# Altium PCB UZ_D_Incr_Encoder.PcbDoc (part 1 of 2)
Units mm, origin at the board's own origin, x right, y up, seen from the top; angles counter-clockwise.
Board outline 155.99 x 100 mm, 2 copper layers (Top Layer, Bottom Layer), stack 0.45 mm thick; 103 components, 109 nets, 501 pads, 172 vias.
Unrouted connection lines stored in the file: 15.
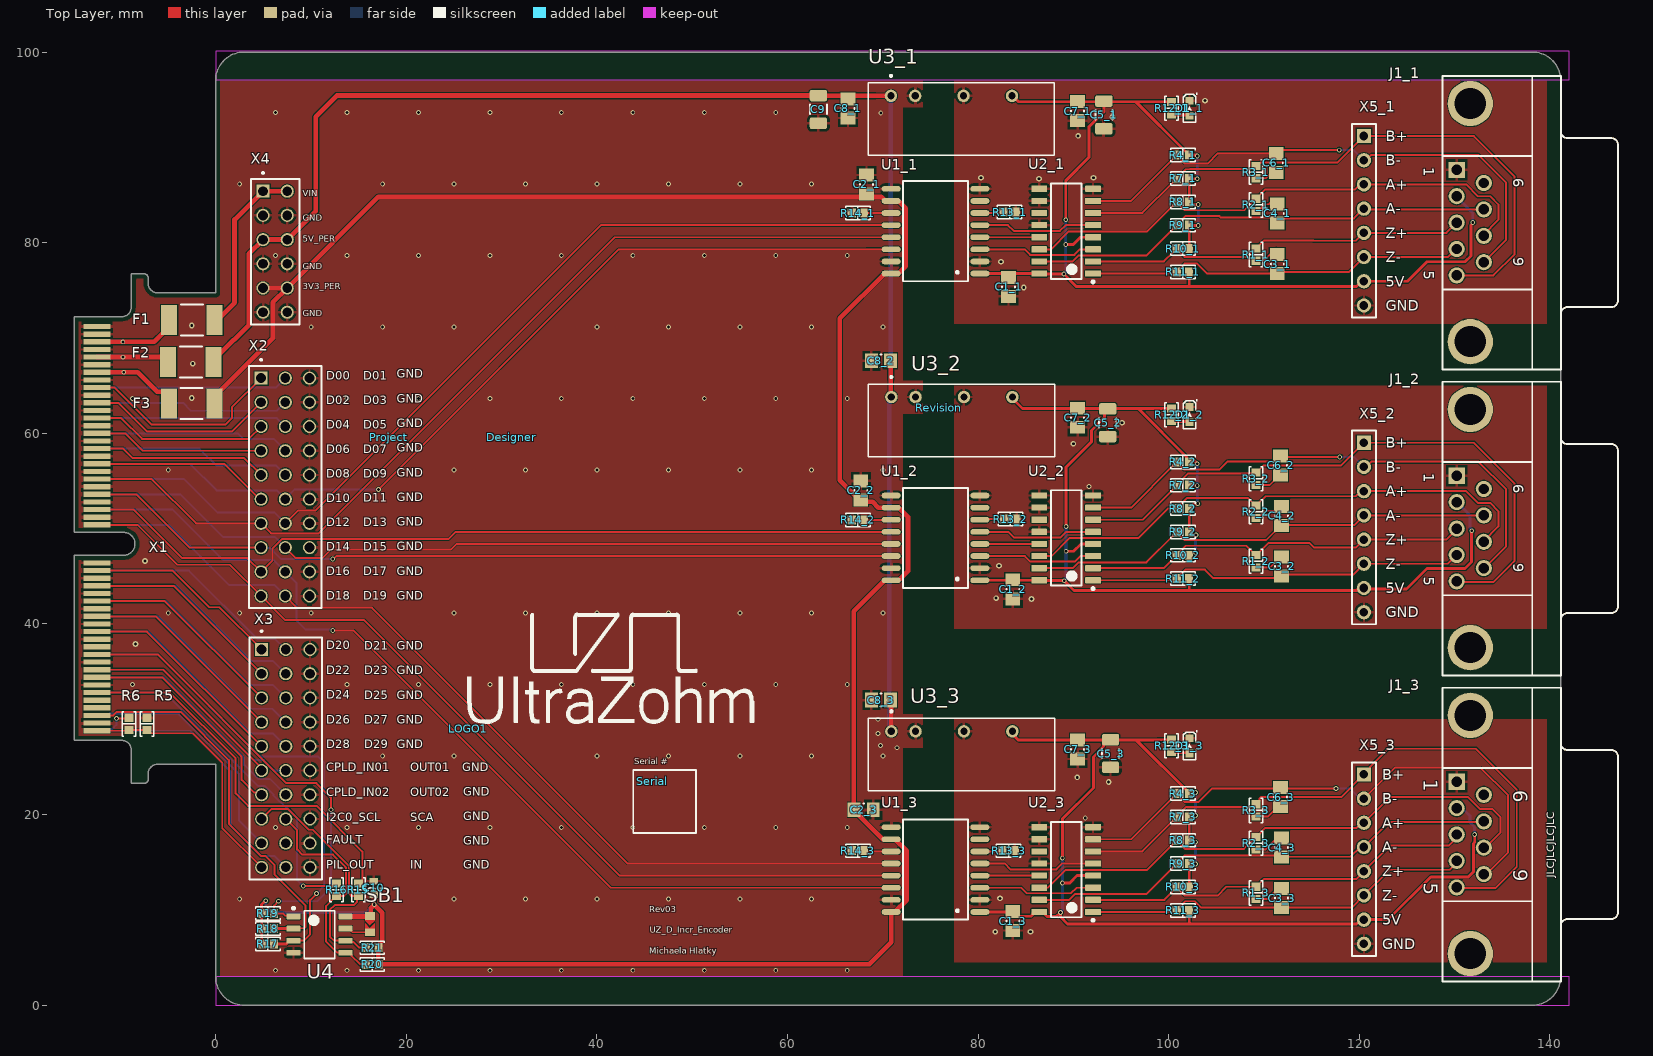
[diagram p0: Top Layer view]
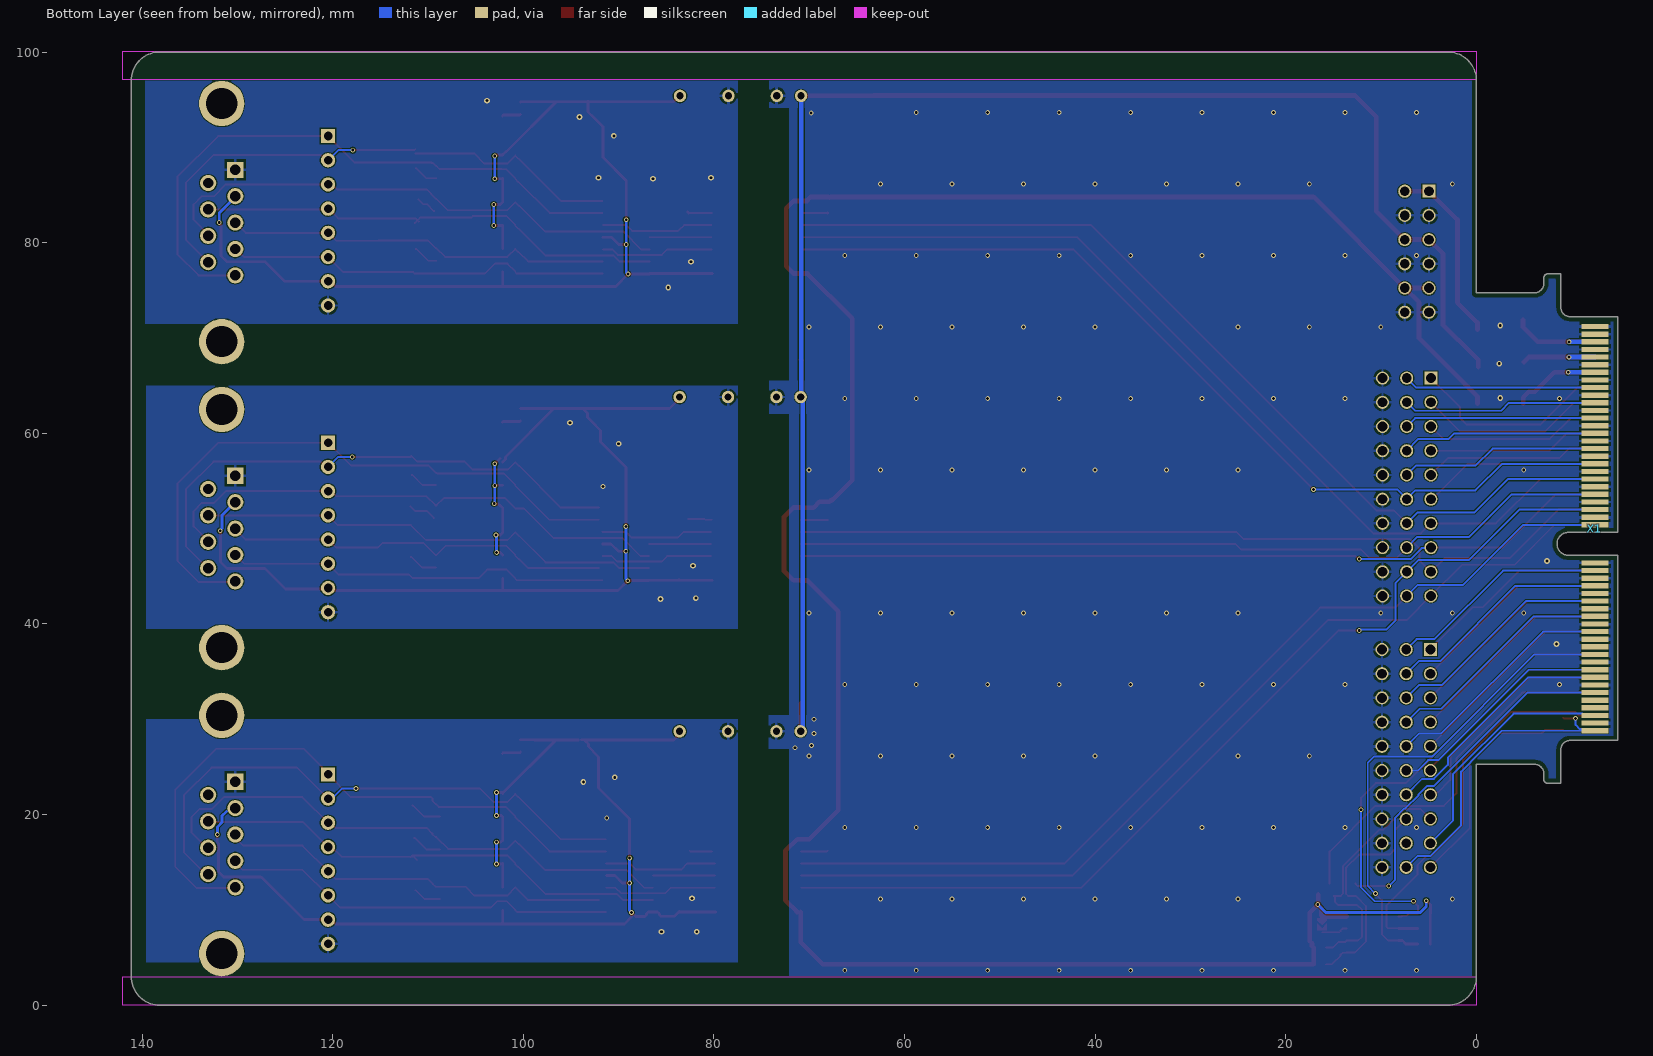
[diagram p1: Bottom Layer view, seen from below]
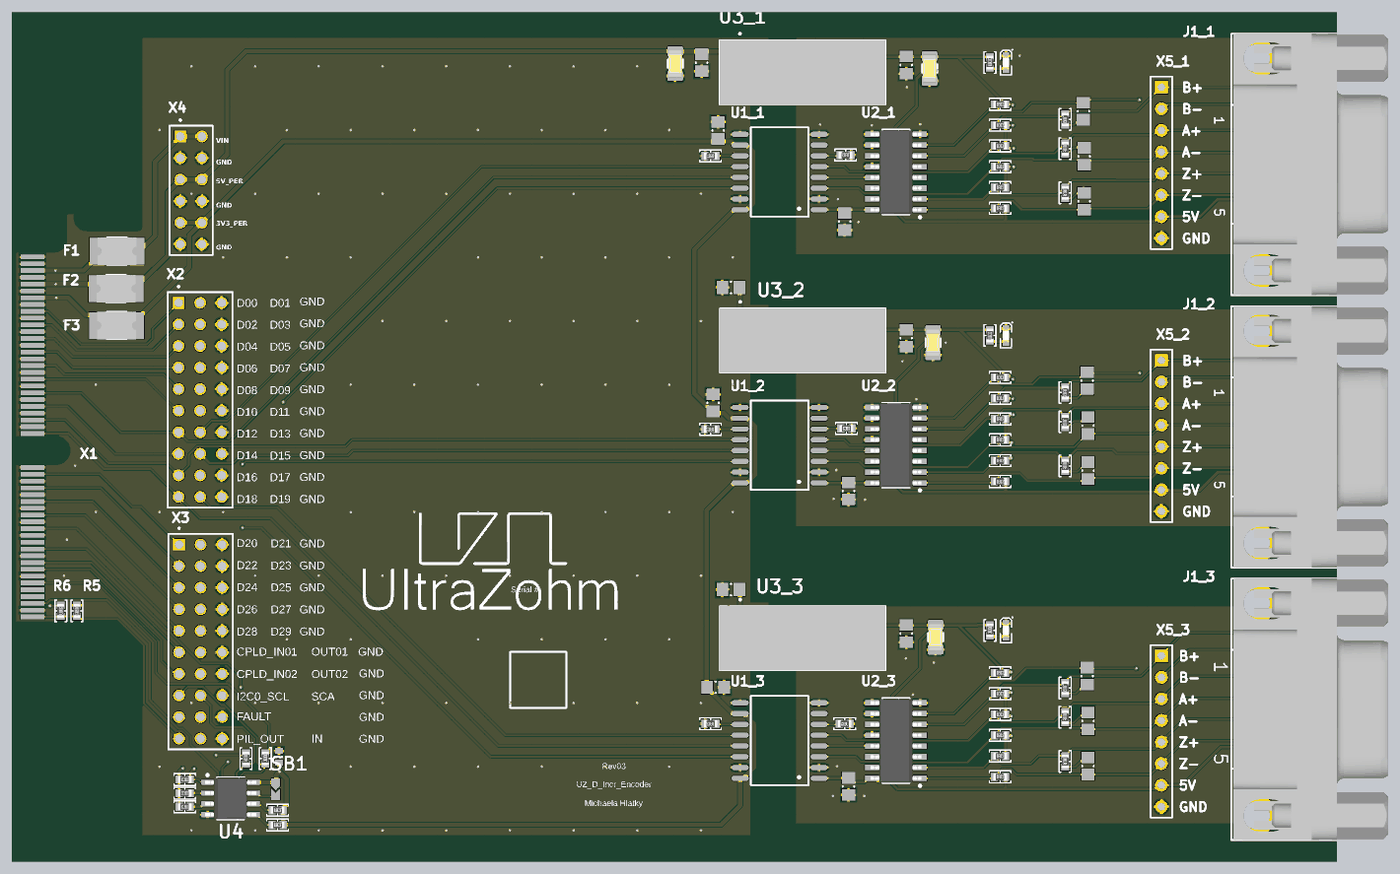
[diagram p3: 3D render of the assembled board from above, using the file's embedded part models]

## Layer stack, top to bottom
Top Solder: solder mask 0.01, Solder Resist, Dk 3.5
Top Layer: signal copper 0.035
Dielectric 1: core 0.38, Core-036, Dk 4.4
Bottom Layer: signal copper 0.035
Bottom Solder: solder mask 0.01, Solder Resist, Dk 3.5

## Board outline
-8.853,26.775 ccw(c-9.853,26.775) -9.853,27.775 -14.853,27.775 -14.853,47.2 -9.653,47.2 ccw(c-9.653,48.4) -9.653,49.6 -14.853,49.6 -14.853,72.225 -9.853,72.225 ccw(c-9.853,73.225) -8.853,73.225 -8.853,76.725 -7.473,76.725 cw(c-7.473,76.325) -7.073,76.325 -7.073,75.725 ccw(c-6.073,75.725) -6.073,74.725 0,74.725 0,97 cw(c3,97) 3,100 138.141,100 cw(c138.141,97) 141.141,97 141.141,3 cw(c138.141,3) 138.141,0 3,0 cw(c3,3) 0,3 0,25.275 -6.073,25.275 ccw(c-6.073,24.275) -7.073,24.275 -7.073,23.675 cw(c-7.473,23.675) -7.473,23.275 -8.853,23.275

## Design rules (kind name [scope] priority, off if disabled: settings)
AssemblyTestPointUsage [InNetClass('3V3_SingleEnded') or InNetClass('5V_SingleEnded') or InNetClass('15V_SingleEnded') or InNetClass('DifferentialSignals')] p1:
BoardOutlineClearance [All] p1: gap=0.5 ignorepadtopadclearanceinfootprint=FALSE except(0: Text-OutlineEdge Text-CavityEdge Text-CutoutEdge Text-SplitBarrior Text-SplitContinuation)
Clearance Clearance_Differential [InNetClass('DifferentialSignals')] p1: gap=0.1 ignorepadtopadclearanceinfootprint=TRUE except(0: Arc-Hole Track-Hole SMDPad-Hole THPad-Hole Via-Hole Fill-Hole Poly-Hole Region-Hole Text-Hole; 0.3: SMDPad-Via; 0.4: THPad-Via)
Clearance Clearance_Power [InNetClass('Power')] p2: gap=0.1 ignorepadtopadclearanceinfootprint=TRUE except(0: Arc-Hole Track-Hole SMDPad-Hole THPad-Hole Via-Hole Fill-Hole Poly-Hole Region-Hole Text-Hole; 0.15: Via-Poly; 0.2: Track-Poly; 0.25: THPad-Poly; 0.3: Fill-Poly Poly-Region; 0.5: Poly-Poly)
Clearance [All] p3: gap=0.1 ignorepadtopadclearanceinfootprint=TRUE except(0: Arc-Hole Track-Hole SMDPad-Hole THPad-Hole Via-Hole Fill-Hole Poly-Hole Region-Hole Text-Hole; 0.4: SMDPad-Via THPad-Via; 0.5: Poly-Poly)
ComponentClearance [All] p1: gap=0.1 collisioncheckmode=3 verticalgap=0.1 showdistances=FALSE
DiffPairsRouting [InNetClass('DifferentialSignals')] p1: maxlimit=0.127 minlimit=0.127 mostfreqgap=0.127 toplayer_minwidth=0.1 toplayer_maxwidth=0.285 toplayer_prefwidth=0.232 bottomlayer_minwidth=0.1 bottomlayer_maxwidth=0.285 bottomlayer_prefwidth=0.232 impedanceprofiledriven=TRUE impedanceprofileid={5F7DE71B-7B0B-4CDE-8AE7-8AD61221F3A5} impedanceprofilevalue=100.000000 maxuncoupledlength=12.7
FanoutControl Fanout_Power [InNetClass('Power') or InNet('ENABLE')] p1: bgadir=Out bgaviamode=Centered fanoutstyle=Auto fanoutdirection=None viagrid=0.025
FanoutControl Fanout_RS422 [InNetClass('DifferentialSignals')] p2: bgadir=Out bgaviamode=Closest fanoutstyle=Rows fanoutdirection=OutOnly viagrid=0.025
FanoutControl Fanout_BGA [IsBGA] p3 off: bgadir=Out bgaviamode=Centered fanoutstyle=Auto fanoutdirection=Alternating viagrid=0.025 // Fanout_BGA (Default Rule)
FanoutControl Fanout_LCC [IsLCC] p4 off: bgadir=Out bgaviamode=Centered fanoutstyle=Auto fanoutdirection=Alternating viagrid=0.025 // Fanout_LCC (Default Rule)
FanoutControl Fanout_SOIC [IsSOIC] p5 off: bgadir=Out bgaviamode=Centered fanoutstyle=Auto fanoutdirection=Alternating viagrid=0.025 // Fanout_SOIC (Default Rule)
FanoutControl Fanout_Small [(CompPinCount < 5)] p6 off: bgadir=Out bgaviamode=Centered fanoutstyle=Auto fanoutdirection=OutThenIn viagrid=0.025 // Fanout_Small (Default Rule)
FanoutControl Fanout_Default [All] p7: bgadir=NE bgaviamode=Closest fanoutstyle=Rows fanoutdirection=InOnly viagrid=0.025 // Fanout_Default (Default Rule)
Height [All] p1: minheight=0 maxheight=50 prefheight=12.7
HoleSize [All] p1: absolutevalues=TRUE maxlimit=4 minlimit=0.025 maxpercent=80.000 minpercent=20.000
PolygonConnect PolygonConnect_Therm [HoleSize > 2.6] p1: connectstyle=Direct reliefconductorwidth=0.254 reliefentries=4 polygonreliefangle="90 Angle" airgapwidth=0.254
PolygonConnect PolygonConnect_via [InPadClass('pad') or IsVia] p2: connectstyle=Direct reliefconductorwidth=0.254 reliefentries=4 polygonreliefangle="90 Angle" airgapwidth=0.254
PolygonConnect [All] p3: connectstyle=Relief reliefconductorwidth=0.3 reliefentries=4 polygonreliefangle="90 Angle" airgapwidth=0.25
RoomDefinition Encoder3 [InComponentClass('Encoder3')] p1: confinementstyle=ConfineIn formatcopy=TRUE lockcomponents=FALSE outline 55,-1.65 152.7,-1.65 152.7,34.3 55,34.3
RoomDefinition Encoder1 [InComponentClass('Encoder1')] p2: confinementstyle=ConfineIn formatcopy=TRUE lockcomponents=FALSE outline 55,65.329 153.06,65.329 153.06,100.279 55,100.279
RoomDefinition Encoder2 [InComponentClass('Encoder2')] p3: confinementstyle=ConfineIn formatcopy=TRUE lockcomponents=FALSE outline 55,33.15 153.1,33.15 153.1,68.1 55,68.1
RoutingLayers RoutingLayers_3V3Signals [InNetClass('3V3_SingleEnded')] p1 off: top layer_v5=TRUE bottom layer_v5=TRUE
RoutingLayers RoutingLayers_SingleEnded [InNetClass('15V_SingleEnded') or InNetClass('3V3_SingleEnded') or InNetClass('5V_SingleEnded')] p2 off: top layer_v5=TRUE bottom layer_v5=TRUE
RoutingLayers RoutingLayers_Differential [InNetClass('DifferentialSignals')] p3 off: top layer_v5=TRUE bottom layer_v5=FALSE
RoutingLayers [All] p4: top layer_v5=TRUE bottom layer_v5=TRUE
RoutingVias [All] p1: holewidth=0.3 width=0.5 viastyle="Through Hole" minholewidth=0.2 minwidth=0.4 maxholewidth=0.5 maxwidth=1
SolderMaskExpansion [All] p1: expansion=0.102 istentingtop=FALSE
UnRoutedNet UnRoutedNet_Signals [InNetClass('15V_SingleEnded') or InNetClass('3V3_SingleEnded') or InNetClass('5V_SingleEnded') or InNetClass('DifferentialSignals')] p1: checkbadconnections=TRUE
UnRoutedNet [All] p2: checkbadconnections=TRUE
Width Width_Power [InNetClass('Power')] p1: maxlimit=10 minlimit=0.2 preferedwidth=0.3 minimp=50.000000 maximp=50.000000 favimp=50.000000
Width [All] p2: maxlimit=10 minlimit=0.1 preferedwidth=0.2
18 further rules are at their usual default settings.

## Classes and differential pairs
channel class Encoder_Interface: Encoder1 Encoder2 Encoder3
component class Encoder2: C1_2 C2_2 C3_2 C4_2 C5_2 C6_2 C7_2 C8_2 D1_2 J1_2 R1_2 R2_2 R3_2 R4_2 R7_2 R8_2 R9_2 R10_2 R11_2 R12_2 R13_2 R14_2 U1_2 U2_2 X5_2
component class Encoder1: C1_1 C2_1 C3_1 C4_1 C5_1 C6_1 C7_1 C8_1 D1_1 F J1_1 R1_1 R2_1 R3_1 R4_1 R7_1 R8_1 R9_1 R10_1 R11_1 R12_1 R13_1 R14_1 U1_1 U2_1 X5_1
component class Encoder3: C1_3 C2_3 C3_3 C4_3 C5_3 C6_3 C7_3 C8_3 D1_3 J1_3 R1_3 R2_3 R3_3 R4_3 R7_3 R8_3 R9_3 R10_3 R11_3 R12_3 R13_3 R14_3 U1_3 U2_3 X5_3
component class CarrierConnector: C9 C10 CarrierConnector F1 F2 F3 R5 R6 R15 R16 R17 R18 R19 R20 R21 SB1 U4 X1 X2 X3 X4

## Components (designator, comment, footprint, x,y, rotation, side; value= is the part's Value field where it differs from the comment)
C1_1 "0.1 µF" C_0805 83.196,75.357 r90 top (schematic designator C1)
C1_2 "0.1 µF" C_0805 83.644,43.626 r90 top (schematic designator C1)
C1_3 "0.1 µF" C_0805 83.644,8.826 r90 top (schematic designator C1)
C2_1 "0.1 µF" C_0805 68.3,86.1 r270 top (schematic designator C2)
C2_2 "0.1 µF" C_0805 67.7,54 r270 top (schematic designator C2)
C2_3 "0.1 µF" C_0805 68,20.5 r180 top (schematic designator C2)
C3_1 "0.01 µF" C_0805 111.396,77.757 r270 top (schematic designator C3)
C3_2 "0.01 µF" C_0805 111.844,46.026 r270 top (schematic designator C3)
C3_3 "0.01 µF" C_0805 111.844,11.226 r270 top (schematic designator C3)
C4_1 "0.01 µF" C_0805 111.396,83.057 r270 top (schematic designator C4)
C4_2 "0.01 µF" C_0805 111.844,51.326 r270 top (schematic designator C4)
C4_3 "0.01 µF" C_0805 111.844,16.526 r270 top (schematic designator C4)
C5_1 "10 µF" C_1206 93.2,93.4 r270 top (schematic designator C5)
C5_2 "10 µF" C_1206 93.6,61.1 r270 top (schematic designator C5)
C5_3 "10 µF" C_1206 93.9,26.4 r270 top (schematic designator C5)
C6_1 "0.01 µF" C_0805 111.296,88.357 r90 top (schematic designator C6)
C6_2 "0.01 µF" C_0805 111.744,56.626 r90 top (schematic designator C6)
C6_3 "0.01 µF" C_0805 111.744,21.826 r90 top (schematic designator C6)
C7_1 "0.1 µF" C_0805 90.444,93.806 r90 top (schematic designator C7)
C7_2 "0.1 µF" C_0805 90.444,61.626 r90 top (schematic designator C7)
C7_3 "0.1 µF" C_0805 90.444,26.826 r90 top (schematic designator C7)
C8_1 "0.1 µF" C_0805 66.35,94.075 r90 top (schematic designator C8)
C8_2 "0.1 µF" C_0805 69.8,67.6 r0 top (schematic designator C8)
C8_3 "0.1 µF" C_0805 69.8,32 r0 top (schematic designator C8)
C9 "10 µF" C_1206 63.25,93.975 r270 top
C10 "100 nF" C_0603 16.6,12.3 r90 top
D1_1 "KT-0603R" WL-SMCW_0603 102.178,94.1 r270 top (schematic designator D1)
D1_2 "KT-0603R" WL-SMCW_0603 102.178,61.95 r270 top (schematic designator D1)
D1_3 "KT-0603R" WL-SMCW_0603 102.178,27.2 r270 top (schematic designator D1)
Designer "Michaela Hlatky" Designator:comment 31.1,59.6 r90 top
F1 "Littelfuse_PTC_1812" 1812_PTC_Polyfuse_Littelfuse -2.489,71.882 r0 top value="PTC, 1.1 A, 24V"
F2 "Littelfuse_PTC_1812" 1812_PTC_Polyfuse_Littelfuse -2.591,67.462 r0 top value="PTC, 1.1 A, 24V"
F3 "Littelfuse_PTC_1812" 1812_PTC_Polyfuse_Littelfuse -2.515,63.119 r0 top value="PTC, 1.1 A, 24V"
J1_1 "DSUB1.385-2H9" DSUB1.385-2H9 141.14,82.1 r270 top locked (schematic designator J1)
J1_2 "DSUB1.385-2H9" DSUB1.385-2H9 141.14,50 r270 top locked (schematic designator J1)
J1_3 "DSUB1.385-2H9" DSUB1.385-2H9 141.14,17.9 r270 top locked (schematic designator J1)
LOGO1 "UZ Logo" UZ_Logo_small 26.5,29 r0 top value=Logo
Project "UZ_D_Incr_Encoder" COMMENT 18.176,59.576 r90 top
R1_1 "120R" "RES 0603_1608" 109.158,78.749 r270 top (schematic designator R1)
R1_2 "120R" "RES 0603_1608" 109.158,46.57 r270 top (schematic designator R1)
R1_3 "120R" "RES 0603_1608" 109.158,11.77 r270 top (schematic designator R1)
R2_1 "120R" "RES 0603_1608" 109.158,83.951 r270 top (schematic designator R2)
R2_2 "120R" "RES 0603_1608" 109.158,51.772 r270 top (schematic designator R2)
R2_3 "120R" "RES 0603_1608" 109.158,16.972 r270 top (schematic designator R2)
R3_1 "120R" "RES 0603_1608" 109.158,87.4 r270 top (schematic designator R3)
R3_2 "120R" "RES 0603_1608" 109.158,55.221 r270 top (schematic designator R3)
R3_3 "120R" "RES 0603_1608" 109.158,20.421 r270 top (schematic designator R3)
R4_1 "4k7" "RES 0603_1608" 101.5,89.179 r0 top (schematic designator R4)
R4_2 "4k7" "RES 0603_1608" 101.5,57 r0 top (schematic designator R4)
R4_3 "4k7" "RES 0603_1608" 101.5,22.2 r0 top (schematic designator R4)
R5 "0R" "RES 0603_1608" -7.2,29.5 r270 top
R6 "0R" "RES 0603_1608" -9.1,29.5 r90 top
R7_1 "4k7" "RES 0603_1608" 101.5,86.728 r0 top (schematic designator R7)
R7_2 "4k7" "RES 0603_1608" 101.5,54.549 r0 top (schematic designator R7)
R7_3 "4k7" "RES 0603_1608" 101.5,19.749 r0 top (schematic designator R7)
R8_1 "4k7" "RES 0603_1608" 101.5,84.277 r0 top (schematic designator R8)
R8_2 "4k7" "RES 0603_1608" 101.5,52.098 r0 top (schematic designator R8)
R8_3 "4k7" "RES 0603_1608" 101.5,17.298 r0 top (schematic designator R8)
R9_1 "4k7" "RES 0603_1608" 101.5,81.827 r0 top (schematic designator R9)
R9_2 "4k7" "RES 0603_1608" 101.5,49.647 r0 top (schematic designator R9)
R9_3 "4k7" "RES 0603_1608" 101.5,14.847 r0 top (schematic designator R9)
R10_1 "4k7" "RES 0603_1608" 101.5,79.376 r0 top (schematic designator R10)
R10_2 "4k7" "RES 0603_1608" 101.5,47.197 r0 top (schematic designator R10)
R10_3 "4k7" "RES 0603_1608" 101.5,12.397 r0 top (schematic designator R10)
R11_1 "4k7" "RES 0603_1608" 101.5,76.925 r0 top (schematic designator R11)
R11_2 "4k7" "RES 0603_1608" 101.5,44.746 r0 top (schematic designator R11)
R11_3 "4k7" "RES 0603_1608" 101.5,9.946 r0 top (schematic designator R11)
R12_1 "1k" "RES 0603_1608" 100.3,94.1 r90 top (schematic designator R12)
R12_2 "1k" "RES 0603_1608" 100.3,61.95 r90 top (schematic designator R12)
R12_3 "1k" "RES 0603_1608" 100.3,27.2 r90 top (schematic designator R12)
R13_1 "4k7" "RES 0603_1608" 83.3,83.2 r180 top (schematic designator R13)
R13_2 "4k7" "RES 0603_1608" 83.4,51 r180 top (schematic designator R13)
R13_3 "4k7" "RES 0603_1608" 83.2,16.2 r180 top (schematic designator R13)
R14_1 "4k7" "RES 0603_1608" 67.4,83.1 r180 top (schematic designator R14)
R14_2 "4k7" "RES 0603_1608" 67.4,50.9 r180 top (schematic designator R14)
R14_3 "4k7" "RES 0603_1608" 67.4,16.2 r180 top (schematic designator R14)
R15 "0R" "RES 0603_1608" 14.981,12.108 r90 top
R16 "0R" "RES 0603_1608" 12.7,12.1 r270 top
R17 "4k7" "RES 0603_1608" 5.5,6.429 r180 top
R18 "4k7" "RES 0603_1608" 5.5,8.029 r180 top
R19 "4k7" "RES 0603_1608" 5.5,9.629 r180 top
R20 "100k" "RES 0603_1608" 16.425,4.279 r0 top
R21 "100k" "RES 0603_1608" 16.425,6.025 r0 top
Revision "Rev03" Designator:comment 75.9,62.7 r90 top
SB1 "Solder Bump 0603" SB_0603 16.2,8.5 r90 top
Serial "Serial #" SERIAL 45.822,23.47 r0 top
U1_1 "ADUM1300BRWZ-RL" "TI ISO7230 SOIC" 75.54,81.2 r180 top (schematic designator U1)
U1_2 "ADUM1300BRWZ-RL" "TI ISO7230 SOIC" 75.54,49.021 r180 top (schematic designator U1)
U1_3 "ADUM1300BRWZ-RL" "TI ISO7230 SOIC" 75.54,14.221 r180 top (schematic designator U1)
U2_1 "AM26LS32ACDR" D0016A_M 89.24,81.2 r180 top (schematic designator U2)
U2_2 "AM26LS32ACDR" D0016A_M 89.24,49.021 r180 top (schematic designator U2)
U2_3 "AM26LS32ACDR" D0016A_M 89.24,14.221 r180 top (schematic designator U2)
U3_1 "TBA_2-0511" SIP7 68.46,96.75 r0 top (schematic designator U3)
U3_2 "TBA_2-0511" SIP7 68.5,65.15 r0 top locked (schematic designator U3)
U3_3 "TBA_2-0511" SIP7 68.5,30.079 r0 top (schematic designator U3)
U4 "M24C02-WMN6TP" D0008A_N 10.9,7.4 r0 top
X1 "HSEC8-150-01-XX-DV-A-BL-CARD" HSEC8-150-01-XX-DV-A-BL-CARD -14.84,49.991 r270 bottom
X2 "Pin Header" SAMTEC_TSW-110-07-F-T 7.315,54.356 r270 top
X3 "Pin Header" SAMTEC_TSW-110-07-F-T 7.366,25.883 r270 top
X4 "Pin Header" SAMTEC_TSW-106-07-F-D 6.248,79.045 r270 top
X5_1 "Pin Header" HDR1X8 120.486,91.186 r270 top (schematic designator X5)
X5_2 "Pin Header" HDR1X8 120.486,59.007 r270 top (schematic designator X5)
X5_3 "Pin Header" HDR1X8 120.486,24.207 r270 top (schematic designator X5)

## Footprints (in the part's own frame and the unit in brackets; to place one, negate y for a bottom-side part, rotate by r counter-clockwise, add the part's x,y. Pads: shape width x height; smd on the part's side, far side on the other; paste and mask are expansions set on the pad)
1812_PTC_Polyfuse_Littelfuse [mm] "Chip Fuse, 2-Leads, Body 4.6x3.24mm"
  rect 1.68x3.14 smd: 1(-2.39,0) 2(2.39,0)
  silkscreen extent -1.15,-1.62 1.15,1.62, body extent -2.3,-1.62 2.3,1.62, height 1.15
C_0603 [mm] "Chip Capacitor, Body 1.6x0.8mm, Height 1.0mm, IPC High Density"
  rect 0.7x0.9 smd: 1(-0.7,0) 2(0.7,0)
  silkscreen extent -0.05,-0.35 0.05,0.35, body extent -0.87,-0.47 0.88,0.48, height 1
C_0805 [mm] "Chip Capacitor, Body 2.0x1.2mm, Height 1.45mm, IPC Low Density"
  rect 1.35x1.55 smd: 1(-1,0) 2(1,0)
  silkscreen extent -0.05,-0.67 0.05,0.67, body extent -1.1,-0.72 1.1,0.72, height 1.45
C_1206 [mm]
  rrect33% 1.21x1.82 smd: 1(1.45,0) 2(-1.45,0)
  silkscreen extent -0.5,-0.9 0.5,0.9, body extent -1.6,-0.81 1.6,0.81, height 1.82
COMMENT [mm] "prints out the comment of a component"
D0008A_N [mm] "SOIC, 8-Leads, Body 5x4mm, Pitch 1.27mm, IPC Medium Density"
  rrect17% 1.45x0.6 smd: 1(-2.725,1.905) 2(-2.725,0.635) 3(-2.725,-0.635) 4(-2.725,-1.905) 5(2.725,-1.905) 6(2.725,-0.635) 7(2.725,0.635) 8(2.725,1.905)
  silkscreen extent -2.85,-2.5 1.6,2.88, body extent -3,-2.45 3,2.45, height 1.63
D0016A_M [mm] "SOIC, 16-Leads, Body 10x4mm, Pitch 1.27mm, IPC Low Density"
  rrect15% 1.65x0.65 smd: 1(-2.825,4.445) 2(-2.825,3.175) 3(-2.825,1.905) 4(-2.825,0.635) 5(-2.825,-0.635) 6(-2.825,-1.905) 7(-2.825,-3.175) 8(-2.825,-4.445) 9(2.825,-4.445) 10(2.825,-3.175) 11(2.825,-1.905) 12(2.825,-0.635) 13(2.825,0.635) 14(2.825,1.905) 15(2.825,3.175) 16(2.825,4.445)
  silkscreen extent -2.95,-5 1.6,5.44, body extent -3,-4.95 3,4.95, height 1.59
Designator:comment [mm] "prints out designator and comment of a component"
DSUB1.385-2H9 [mm] "Connector; D Subminiature; 9 Position; Right Angle; Pitch 1.385 mm"
  rect 1.69x1.69 hole 1.09: 1(-5.54,-10.92)
  round 1.69 hole 1.09: 2(-2.77,-10.92) 3(0,-10.92) 4(2.77,-10.92) 5(5.54,-10.92) 6(-4.155,-8.08) 7(-1.385,-8.08) 8(1.385,-8.08) 9(4.155,-8.08)
  round 4.76 hole 3.26: 10(-12.495,-9.5) 11(12.495,-9.5)
  silkscreen extent -15.4,-12.4 15.4,6, body extent -15.4,-12.2 15.41,6, height 12.8
HDR1X8 [mm] "Connector; Header; 8 Position"
  rect 1.5x1.5 hole 0.9: 1(0,0)
  round 1.5 hole 0.9: 2(2.54,0) 3(5.08,0) 4(7.62,0) 5(10.16,0) 6(12.7,0) 7(15.24,0) 8(17.78,0)
  silkscreen extent -1.27,-1.27 19.05,1.27
HSEC8-150-01-XX-DV-A-BL-CARD [mm]
  rect 0.55x2.8 smd far side mask+0.05: 1(-21.2,-2.4) 3(-20.4,-2.4) 5(-19.6,-2.4) 7(-18.8,-2.4) 9(-18,-2.4) 11(-17.2,-2.4) 13(-16.4,-2.4) 15(-15.6,-2.4) 17(-14.8,-2.4) 19(-14,-2.4) 21(-13.2,-2.4) 23(-12.4,-2.4) 25(-11.6,-2.4) 27(-10.8,-2.4) 29(-10,-2.4) 31(-9.2,-2.4) 33(-8.4,-2.4) 35(-7.6,-2.4) 37(-6.8,-2.4) 39(-6,-2.4) 41(-5.2,-2.4) 43(-4.4,-2.4) 45(-3.6,-2.4) 47(-2.8,-2.4) 49(-2,-2.4) 51(-1.2,-2.4) 53(-0.4,-2.4) 55(3.6,-2.4) 57(4.4,-2.4) 59(5.2,-2.4) 61(6,-2.4) 63(6.8,-2.4) 65(7.6,-2.4) 67(8.4,-2.4) 69(9.2,-2.4) 71(10,-2.4) 73(10.8,-2.4) 75(11.6,-2.4) 77(12.4,-2.4) 79(13.2,-2.4) 81(14,-2.4) 83(14.8,-2.4) 85(15.6,-2.4) 87(16.4,-2.4) 89(17.2,-2.4) 91(18,-2.4) 93(18.8,-2.4) 95(19.6,-2.4) 97(20.4,-2.4) 99(21.2,-2.4)
  rect 0.55x2.8 smd mask+0.05: 2(-21.2,-2.4) 4(-20.4,-2.4) 6(-19.6,-2.4) 8(-18.8,-2.4) 10(-18,-2.4) 12(-17.2,-2.4) 14(-16.4,-2.4) 16(-15.6,-2.4) 18(-14.8,-2.4) 20(-14,-2.4) 22(-13.2,-2.4) 24(-12.4,-2.4) 26(-11.6,-2.4) 28(-10.8,-2.4) 30(-10,-2.4) 32(-9.2,-2.4) 34(-8.4,-2.4) 36(-7.6,-2.4) 38(-6.8,-2.4) 40(-6,-2.4) 42(-5.2,-2.4) 44(-4.4,-2.4) 46(-3.6,-2.4) 48(-2.8,-2.4) 50(-2,-2.4) 52(-1.2,-2.4) 54(-0.4,-2.4) 56(3.6,-2.4) 58(4.4,-2.4) 60(5.2,-2.4) 62(6,-2.4) 64(6.8,-2.4) 66(7.6,-2.4) 68(8.4,-2.4) 70(9.2,-2.4) 72(10,-2.4) 74(10.8,-2.4) 76(11.6,-2.4) 78(12.4,-2.4) 80(13.2,-2.4) 82(14,-2.4) 84(14.8,-2.4) 86(15.6,-2.4) 88(16.4,-2.4) 90(17.2,-2.4) 92(18,-2.4) 94(18.8,-2.4) 96(19.6,-2.4) 98(20.4,-2.4) 100(21.2,-2.4)
"RES 0603_1608" [mm] "Chip Resistor, 2-Leads, Body 1.60x0.80mm, IPC Medium Density"
  rect 0.85x0.95 smd: 1(-0.65,0) 2(0.65,0)
  silkscreen extent -1.27,-0.7 1.27,0.7, body extent -0.8,-0.4 0.8,0.4, height 0.45
SAMTEC_TSW-106-07-F-D [mm]
  rect 1.37x1.37 hole 1.02: 01(-6.35,-1.27)
  round 1.37 hole 1.02: 02(-6.35,1.27) 03(-3.81,-1.27) 04(-3.81,1.27) 05(-1.27,-1.27) 06(-1.27,1.27) 07(1.27,-1.27) 08(1.27,1.27) 09(3.81,-1.27) 10(3.81,1.27) 11(6.35,-1.27) 12(6.35,1.27)
  silkscreen extent -8.37,-2.54 7.62,2.54
SAMTEC_TSW-110-07-F-T [mm]
  rect 1.37x1.37 hole 1.02: 01(-11.43,-2.54)
  round 1.37 hole 1.02: 02(-11.43,0) 03(-11.43,2.54) 04(-8.89,-2.54) 05(-8.89,0) 06(-8.89,2.54) 07(-6.35,-2.54) 08(-6.35,0) 09(-6.35,2.54) 10(-3.81,-2.54) 11(-3.81,0) 12(-3.81,2.54) 13(-1.27,-2.54) 14(-1.27,0) 15(-1.27,2.54) 16(1.27,-2.54) 17(1.27,0) 18(1.27,2.54) 19(3.81,-2.54) 20(3.81,0) 21(3.81,2.54) 22(6.35,-2.54) 23(6.35,0) 24(6.35,2.54) 25(8.89,-2.54) 26(8.89,0) 27(8.89,2.54) 28(11.43,-2.54) 29(11.43,0) 30(11.43,2.54)
  silkscreen extent -13.45,-3.81 12.7,3.81
SB_0603 [mil] "Solder Bump"
  rect 32x40 smd: 1(33.75,0) 2(-33.75,0)
  Top Layer region: 23.75,20 14.75,20 -5.25,0 14.75,-20 23.75,-20
  Top Layer region: -26.25,0 -17.25,0 2.75,20 -26.25,20
  Top Layer region: -26.25,0 -17.25,0 2.75,-20 -26.25,-20
SERIAL [mm]
  silkscreen extent -2,-5.4 4.6,1.2
SIP7 [mm]
  round 1.303 hole 0.76: 1(2.4,-1.35) 2(4.94,-1.35) 4(10.02,-1.35) 6(15.1,-1.35)
  silkscreen extent 0,-7.6 19.55,0.84, body extent 0,-7.6 19.5,0, height 10.08
"TI ISO7230 SOIC" [mm] "SOIC, 16-Leads, Body 10,30x7,50mm, Pitch 1,27mm, IPC Medium Density"
  oval 2x0.6 smd: 1(-4.65,4.445) 2(-4.65,3.175) 3(-4.65,1.905) 4(-4.65,0.635) 5(-4.65,-0.635) 6(-4.65,-1.905) 7(-4.65,-3.175) 8(-4.65,-4.445) 9(4.65,-4.445) 10(4.65,-3.175) 11(4.65,-1.905) 12(4.65,-0.635) 13(4.65,0.635) 14(4.65,1.905) 15(4.65,3.175) 16(4.65,4.445)
  silkscreen extent -3.4,-5.25 3.4,5.25, body extent -3.8,-5.25 3.8,5.25, height 2.65
UZ_Logo_small [mm] "logo width 3cm"
  silkscreen extent -0.05,0.57 29.94,12.12
WL-SMCW_0603 [mm] "SMD Mono-color Chip LED, body 1.6x0.8mm"
  rect 0.8x0.8 smd: 1(-0.8,0) 2(0.8,0)
  silkscreen extent -1.59,-0.65 1.45,0.83, body extent -0.8,-0.4 0.8,0.4, height 0.7

## Part data
C1_1 C1_2 C1_3 C2_1 C2_2 C2_3 C7_1 C7_2 C7_3 C8_1 C8_2 C8_3: library part C0805C104J5RECTU, "Capacitor 0805, 50 VDC, 0.1 µF, X7R", Device Package=0805, LCSC Part Number=C49678, Manufacturer=KEMET, Operating Temperature="-55 - 125°C", Supplier Part Number 1=80-C0805C104J5RECTU, Tolerance="5 %", Voltage Rating="50 VDC", Component Type="Capacitor 0805", ComponentLink1Description=Datasheet, ComponentLink1URL=https://www.mouser.de/datasheet/2/212/KEM_C1002_X7R_SMD-1102033.pdf, Created from=MGremer, Created On="20.12.2020 13:54:13", Last Updated="27.05.2022 20:15:41", Live Cycle Status=1, Manufacturer Part Number=C0805C104J5RECTU, Mounting Type=SMD, PartID=17, Series="SMD Comm X7R", Stock number="Labor SMD Container", Supplier 1=Mouser, Type=Capacitor
C3_1 C3_2 C3_3 C4_1 C4_2 C4_3 C6_1 C6_2 C6_3: library part C0805X103K5RAC3316, "Capacitor 0805, 50 VDC, 0.01 µF, X7R", Device Package=0805, LCSC Part Number=C1710, Manufacturer=KEMET, Operating Temperature="-55 - 125°C", Supplier Part Number 1=80-C0805X103K5RC3316, Tolerance="10 %", Voltage Rating="50 VDC", Component Type="Capacitor 0805", ComponentLink1Description=Datasheet, ComponentLink1URL=https://www.mouser.de/datasheet/2/212/KEM_X7R_FT_VW_AUDI-1775098.pdf, Created from=MGremer, Created On="20.12.2020 13:54:13", Last Updated="27.05.2022 20:11:47", Live Cycle Status=1, Manufacturer Part Number=C0805X103K5RAC3316, Mounting Type=SMD, PartID=21, Series="SMD Comm X7R", Stock number="Labor SMD Container", Supplier 1=Mouser, Type=Capacitor
C5_1 C5_2 C5_3 C9: library part CGA5L1X7R1H106K160AC, "Capacitor 1206, 50 VDC, 10 µF, X7R", Device Package=1206, LCSC Part Number=C13585, Manufacturer=TDK, Operating Temperature="-55 - 125°C", Supplier Part Number 1=810-CGA5L1X7R1H106K1, Tolerance="10 %", Voltage Rating="50 VDC", Component Type="Capacitor 1206", ComponentLink1Description=Datasheet, ComponentLink1URL=https://product.tdk.com/info/en/catalog/datasheets/mlcc_automotive_general_en.pdf, Created from=MGremer, Created On="20.12.2020 13:54:13", Last Updated="27.05.2022 14:15:21", Live Cycle Status=1, Manufacturer Part Number=CGA5L1X7R1H106K160AC, Mounting Type=SMD, PartID=25, Series=CGA, Stock number="Labor SMD Container", Supplier 1=Mouser, Type=Capacitor
C10: library part C0603C104K9PACTU, "Capacitor 0603, 6.3 VDC, 100 nF, X5R", Device Package=0603, Manufacturer=KEMET, Operating Temperature="-55 - 85°C", Supplier Part Number 1=80-C0603C104K9P, Tolerance="10 %", Voltage Rating="6.3 VDC", Component Type="Capacitor 0603", ComponentLink1Description=Datasheet, ComponentLink1URL=https://www.mouser.de/datasheet/2/212/KEM_C1006_X5R_SMD-1103249.pdf, Created from=MGremer, Created On="20.12.2020 13:54:13", Last Updated="20.01.2021 13:57:36", Live Cycle Status=1, Manufacturer Part Number=C0603C104K9PACTU, Mounting Type=SMD, PartID=70, Series="SMD Comm X5R", Stock number="not stored", Supplier 1=Mouser, Type=Capacitor
D1_1 D1_2 D1_3: "LED RED 520~625NM 90~100MCD@20MA TOP VIEW 0603 ROHS", Color=red, Device Package=0603, Forward Current I_f="20 mA", Forward Voltage U_f="2.1 V", LCSC Part Number=C2286, Manufacturer="Hubei KENTO Elec", Nominal Power="42 mW", Operating Temperature="-40 - 85 °C", Component Type="LED Diode", ComponentLink1Description=Datasheet, ComponentLink1URL=https://datasheet.lcsc.com/szlcsc/Hubei-KENTO-Elec-KT-0603R_C2286.pdf, Created from="T. Wendt", Created On="03.03.2021 10:06:23", Last Updated="04.03.2021 09:02:49", Light Intensity="110 mcd", Live Cycle Status=1, Manufacturer Part Number=KT-0603R, Mounting Type=SMD, PartID=8, Stock number="not stored", Supplier 1=LCSC, Supplier Part Number 1=C2286, Type=Standard, Wavelength="620 nm"
Designer: library part 4, "Create a project parameter named \"Author\" this is the value of this component. It is printed on the PCB. Once the parameter is updated (e.g. new revision) it gets updated on the PCB as well", Manufacturer="PCB Manufacturer", Manufacturer Part Number="Project Author", Component Type="Project Author", Created from="T. Wendt", Created On="01.03.2021 08:53:41", Last Updated="01.03.2021 09:20:27", Live Cycle Status=1, PartID=4, Type="Standard (No BOM)"
F1 F2 F3: "POLYSWITCH RESETTABLE DEVICES", Hold Current=1.1A, LCSC Part Number=C70119, Manufacturer=Littelfuse, MPN=miniASMDC110F/24, Nominal current="1 A", Operating Temperature="-40 - 85 °C", Package=1812, Resistance="0.18 Ohm", Supplier Part Number 1=530-0ZCG0150BF2C, Trip Current=2.2A, Voltage=24V, Component Type=Littelfuse_PTC_1812, ComponentLink1Description=Datasheet, ComponentLink1URL=https://www.littelfuse.com/~/media/electronics/datasheets/resettable_ptcs/littelfuse_ptc_surface_mount_catalog_datasheet.pdf.pdf, Created=2019_02_10_AGeiger, Created from=MHlatky, Created On="07.05.2021 06:50:33", Last Updated="27.05.2022 15:06:17", Live Cycle Status=1, Manufacturer Part Number=Littelfuse_PTC_1812, MF=Littelfuse, Mounting Type=SMD, PartID=5, Supplier 1=Mouser, Type=Fuse
J1_1 J1_2 J1_3: "Connector; D Subminiature; 9 Position; Right Angle; Pitch 1.385 mm", Device Package=-, LCSC Part Number=C141882, Manufacturer="TE Connectivity", PackageDocument=O, Supplier Part Number 1=571-2311765-1, Component Type="DSUB Connector", ComponentLink1Description=Datasheet, ComponentLink1URL=https://www.mouser.de/datasheet/2/418/7/ENG_CD_2311765_D-2072985.pdf, Created from=MHlatky, Created On="26.01.2021 09:19:51", DatasheetDocument=1-Sep-1999, Gender=Receptacle, Last Updated="27.05.2022 15:54:50", LatestRevisionDate=17-Jul-2002, LatestRevisionNote="Re-released for DXP Platform.", Live Cycle Status=1, Manufacturer Part Number=DSUB1.385-2H9, Orientation="Right Angle", PackageReference=788750, PartID=5, Positions=9, Published=15-Jun-2001, Publisher="Altium Limited", Stock number="not stored", Supplier 1=Mouser, Type="DSUB Connector"
LOGO1: library part "Logo small", Manufacturer=UltraZohm, Supplier Part Number 1=-, Component Type=Logo, ComponentLink1Description=https://docs.ultrazohm.com/, ComponentLink1URL=homepage, Created=Jan2021_Liegmann, Created from=MGremer, Created On="03.11.2021 09:04:23", Last Updated="03.11.2021 09:05:50", Live Cycle Status=1, Manufacturer Part Number="Logo small", PartID=10, Supplier 1=-, Type=Logo
Project: library part 2, "Create a project parameter named \"ProjectNameCustom\" this is the value of this component and it is printed on the PCB.", Manufacturer="PCB Manufacturer", Manufacturer Part Number="Project Name", Component Type="Project Name", Created from="T. Wendt", Created On="01.03.2021 08:43:57", Last Updated="01.03.2021 09:07:27", Live Cycle Status=1, PartID=2, Type="Standard (No BOM)"
R1_1 R1_2 R1_3 R2_1 R2_2 R2_3 R3_1 R3_2 R3_3: library part RK73B1JTTD121J, "SMD resistor E24 series", Device Package=0603, LCSC Part Number=C22787, Manufacturer="KOA Speer", Supplier Part Number 1=660-RK73B1JTTD121J, Tolerance=5%, Component Type="SMD resistor", ComponentLink1Description=Datasheet, ComponentLink1URL=https://www.mouser.de/datasheet/2/219/RK73B-1825463.pdf, Created from=MGremer, Created On="14.12.2020 16:17:14", Last Updated="27.05.2022 13:40:47", Live Cycle Status=1, Manufacturer Part Number=RK73B1JTTD121J, Mounting Type=SMD, PartID=52, Stock number="Labor SMD Container", Supplier 1=Mouser, Type=Resistor
R4_1 R4_2 R4_3 R7_1 R7_2 R7_3 R8_1 R8_2 R8_3 R9_1 R9_2 R9_3 R10_1 R10_2 R10_3 R11_1 R11_2 R11_3 R13_1 R13_2 R13_3 R14_1 R14_2 R14_3: library part RK73B1JTTD472J, "SMD resistor E24 series", Device Package=0603, LCSC Part Number=C23162, Manufacturer="KOA Speer", Supplier Part Number 1=660-RK73B1JTTD472J, Tolerance=5%, Component Type="SMD resistor", ComponentLink1Description=Datasheet, ComponentLink1URL=https://www.mouser.de/datasheet/2/219/RK73B-1825463.pdf, Created from=MGremer, Created On="14.12.2020 16:17:14", Last Updated="27.05.2022 13:46:16", Live Cycle Status=1, Manufacturer Part Number=RK73B1JTTD472J, Mounting Type=SMD, PartID=90, Stock number="Labor SMD Container", Supplier 1=Mouser, Type=Resistor
R5 R6 R15 R16: library part RC0603JR-070RL, "SMD resistor E24 series", Device Package=0603, LCSC Part Number=C21189, Manufacturer=YAGEO, Supplier Part Number 1=603-RC0603JR-070RL, Tolerance=5%, Component Type="SMD resistor", ComponentLink1Description=Datasheet, ComponentLink1URL=https://www.mouser.de/datasheet/2/447/PYu-RC_Group_51_RoHS_L_10-1664068.pdf, Created from=MGremer, Created On="14.12.2020 16:17:14", Last Updated="04.03.2021 09:09:42", Live Cycle Status=1, Manufacturer Part Number=RC0603JR-070RL, Mounting Type=SMD, PartID=1, Stock number="Labor SMD Container", Supplier 1=Mouser, Supplier 2=LCSC, Supplier Part Number 2=C21189, Type=Resistor
R12_1 R12_2 R12_3: library part RK73B1JTTDD102J, "SMD resistor E24 series", Device Package=0603, LCSC Part Number=C21190, Manufacturer="KOA Speer", Supplier Part Number 1=660-RK73B1JTTDD102J, Tolerance=5%, Component Type="SMD resistor", ComponentLink1Description=Datasheet, ComponentLink1URL=https://www.mouser.de/datasheet/2/219/RK73B-1825463.pdf, Created from=MGremer, Created On="14.12.2020 16:17:14", Last Updated="27.05.2022 13:40:21", Live Cycle Status=1, Manufacturer Part Number=RK73B1JTTDD102J, Mounting Type=SMD, PartID=74, Stock number="Labor SMD Container", Supplier 1=Mouser, Type=Resistor
R17 R18 R19: library part 0603WAF4701T5E, "SMD resistor E24 series", Device Package=0603, LCSC Part Number=C23162, Manufacturer=UNI-ROYAL, Tolerance=1%, Component Type="SMD resistor", ComponentLink1Description=Datasheet, ComponentLink1URL=https://datasheet.lcsc.com/lcsc/2206010116_UNI-ROYAL-Uniroyal-Elec-0603WAF4701T5E_C23162.pdf, Created from=AGeiger, Created On="14.12.2020 16:17:14", Last Updated="25.08.2022 20:03:04", Live Cycle Status=1, Manufacturer Part Number=0603WAF4701T5E, Mounting Type=SMD, PartID=90, Stock number="Labor SMD Container", Supplier 1=LCSC, Supplier Part Number 1=C23162, Type=Resistor
R20 R21: library part RK73B1JTTD104J, "SMD resistor E24 series", Device Package=0603, LCSC Part Number=C25803, Manufacturer="KOA Speer", Supplier Part Number 1=660-RK73B1JTTD104J, Tolerance=5%, Component Type="SMD resistor", ComponentLink1Description=Datasheet, ComponentLink1URL=https://www.mouser.de/datasheet/2/219/RK73B-1825463.pdf, Created from=MGremer, Created On="14.12.2020 16:17:14", Last Updated="27.05.2022 14:04:10", Live Cycle Status=1, Manufacturer Part Number=RK73B1JTTD104J, Mounting Type=SMD, PartID=122, Stock number="Labor SMD Container", Supplier 1=Mouser, Type=Resistor
Revision: library part 3, "Create a project parameter named \"ProjectRevision\" this is the value of this component. It is printed on the PCB. Once the parameter is updated (e.g. new revision) it gets updated on the PCB as well", Manufacturer="PCB Manufacturer", Manufacturer Part Number="Project Revision", Component Type="Project Revision", Created from="T. Wendt", Created On="01.03.2021 08:50:34", Last Updated="01.03.2021 09:28:36", Live Cycle Status=1, PartID=3, Type="Standard (No BOM)"
SB1: Device Package=0603, Component Type="Solder Bump", Created from=AGeiger, Created On="09/01/2024 17:13:56", Last Updated="02/10/2025 12:53:47", Manufacturer Part Number="Solder Bump 0603", Mounting Type=SMD, PartID=1, Revision="July-2002: Re-released for DXP Platform."
Serial: library part 6, "Field to put in a serial number", Manufacturer="PCB Manufacturer", Manufacturer Part Number="Serial Number", Component Type="Serial Number", Created from="T. Wendt", Created On="02.03.2021 14:31:24", Last Updated="02.03.2021 14:31:24", Live Cycle Status=1, PartID=6, Type="Standard (No BOM)"
U1_1 U1_2 U1_3: "ADUM 1300 Triple-Channel Digital Isolator", LCSC Part Number=C72910, Manufacturer="Analog Devices", Operating Temperature="-40 - +125 °C", Supplier Part Number 1=595-ISO7230CDWR, Channels=3, Component Type="Digital Isolator", ComponentLink1Description=Datasheet, ComponentLink1URL=https://www.analog.com/media/en/technical-documentation/data-sheets/adum1300_1301.pdf, Created from=ELiegmann, Created On="27.05.2022 09:03:43", Last Updated="27.05.2022 17:38:46", Live Cycle Status=1, Manufacturer Part Number=ADUM1300BRWZ-RL, Mounting Type=SOIC, PartID=2, Supplier 1=Mouser, Type="Logic - Isolators"
U2_1 U2_2 U2_3: "AM26LS32Ax, AM26LS33Ax Quadruple Differential Line Receivers", LCSC Part Number=C6180, Manufacturer="Texas Instruments", Operating Temperature="0 - 70 °C", PackageTopMarking=NSUZXYTTE#*DS26LS32*ACM, PartNumber=DS26LS32ACM, PowerWise=N, Supplier Part Number 1=595-AM26LS32ACDR, Code_IPC=SOIC127P600-16, Code_JEDEC=MS-012-AC, Component Type="Quad Diff. Receiver", ComponentLink1Description=Datasheet, ComponentLink1URL=https://www.ti.com/lit/ds/symlink/am26ls32ac.pdf, ComponentLink2Description="DS26LS32AC Web Page", ComponentLink2URL=http://www.national.com/pf/DS/DS26LS32AC.html, ComponentLink3Description="M16A Package Page", ComponentLink3URL=http://www.national.com/packaging/folders/m16a.html, CompType="Interface IC", Created from=MHlatky, Created On="26.01.2021 09:03:43", DatasheetVersion=May-1999, Last Updated="27.05.2022 17:40:36", Live Cycle Status=1, Manufacturer Part Number=AM26LS32ACDR, Mounting Type=SMT, PackageDescription="Molded Package, SO, .150in Wide, 16 Lead", PackageReference=M16A, PackageVersion="revJ, Aug-1995", PartID=14, PinCount=16, Published=4-Dec-2008, Publisher="Altium Limited", RoHS=N, Stock number="not stored", Supplier 1=Mouser, Type="Diff Line Receivers"
U3_1 U3_2 U3_3: "4.5-5.5 V Input, 5 V @ 400 mA Output, 2 W, isolated DC/DC-converter", Device Package="19.55mm x 7.6 mm x 10.2 mm", LCSC Part Number=C6329167, Manufacturer="TRACO Power", Operating Temperature="-40 - 80 °C", Component Type="Isolated DC/DC", ComponentLink1Description=Datasheet, ComponentLink1URL=https://www.tracopower.com/tba2-datasheet, Created from=TGaupp, Created On="28/04/2026 12:30:53", Last Updated="28/04/2026 12:43:25", Live Cycle Status=1, Manufacturer Part Number=TBA_2-0511, Mounting Type=THT, PartID=25, Stock number="not stored", Supplier 1=LCSC, Supplier Part Number 1=C6329167, Type="Isolated DC/DC"
U4: "2Kbit I2C SOP-8 EEPROM ROHS", Device Package=SOIC-8, LCSC Part Number=C7562, Manufacturer=STMicroelectronics, Operating Temperature="-40 to +85 °C", Supplier Part Number 1=511-M24C02-WMN6TP, Component Type=EEPROM, ComponentLink1Description=Datasheet, ComponentLink1URL=https://www.st.com/resource/en/datasheet/m24c01-w.pdf, Created from=AGeiger, Created On="19.11.2023 14:54:27", Last Updated="19.11.2023 21:39:04", Manufacturer Part Number=M24C02-WMN6TP, Mounting Type=SMD, PartID=1, Series=M24xxx, Supplier 1=Mouser, Supplier 2=LCSC, Supplier Part Number 2=C7562, Type=Memory
X1: "Mating Card Layout for HSEC8-150-01-XX-DV-A-BL", Manufacturer=SAMTEC, Created=2018_04_23_AGeiger
X2 X3: library part TSW-110-07-F-T, "THROUGH-HOLE .025\" SQ POST HEADER", Device Package=THT, Manufacturer=SAMTEC, Operating Temperature="-55 +125 °C", Package=None, Supplier Part Number 1=200-TSW11007FT, Availability=Unavailable, Component Type="Pin Header", ComponentLink1Description=Datasheet, ComponentLink1URL=https://www.mouser.de/datasheet/2/527/tsw_th-2854687.pdf, Created from=MHlatky, Created On="22.11.2021 15:31:45", Last Updated="20.12.2021 07:38:08", Live Cycle Status=1, Manufacturer Part Number=TSW-110-07-F-T, MF="Samtec Inc.", Mounting Type=THT, MP=TSW-110-07-F-T, PartID=7, Price=None, Series=TSW, Stock number="not stored", Supplier 1=Mouser, Type="Pin Header"
X4: library part TSW-106-07-F-D, "THROUGH-HOLE .025\" SQ POST HEADER", Device Package=THT, Manufacturer=SAMTEC, Operating Temperature="-55 +125 °C", Package=None, Supplier Part Number 1=200-TSW10607FD, Availability=Unavailable, Component Type="Pin Header", ComponentLink1Description=Datasheet, ComponentLink1URL=https://www.mouser.de/datasheet/2/527/tsw_th-2854687.pdf, Created from=MHlatky, Created On="22.11.2021 15:31:45", Last Updated="20.12.2021 07:38:08", Live Cycle Status=1, Manufacturer Part Number=TSW-106-07-F-D, MF=Samtec, Mounting Type=THT, MP=TSW-106-07-F-D, PartID=8, Price=None, Series=TSW, Stock number="not stored", Supplier 1=Mouser, Type="Pin Header"
X5_1 X5_2 X5_3: library part 103741-8, "8 Pin", Manufacturer="TE Connectivity", Supplier Part Number 1=571-103741-8, Component Type="Pin Header", ComponentLink1Description=Datasheet, ComponentLink1URL=https://www.mouser.de/datasheet/2/427/VISH_S_A0003529023_1-2568887.pdf, Created from=MHlatky, Created On="22.11.2021 15:31:45", Last Updated="21.03.2022 12:19:22", Live Cycle Status=1, Manufacturer Part Number=103741-8, PartID=9, Stock number="not stored", Supplier 1=Mouser, Type="Pin Header"

## Via types
v1: diameter 0.5, hole 0.3, Top Layer to Bottom Layer, tented both sides, 149 vias
v2: diameter 0.6, hole 0.3, Top Layer to Bottom Layer, tented both sides, 23 vias

## Nets (pads, with @x,y where several pads share a name; then routed paths per layer and width w, separated by ;. In a path a pad name is that pad's centre, name@x,y a point inside that pad or via, vN(x,y) a via of type N, cw(c..) or ccw(c..) an arc to the next point about the centre after c; other vN are vias at no path point)
0Z_encoder1: U1_1.14 X1.38 X2.17 | length 95.7
  Top Layer w0.2: v1(17.1,54.1) 42.298,79.298 68.202,79.298 ; 68.2,79.3 68.202,79.298 ; U1_1.14@70.887,79.298 68.202,79.298
  Bottom Layer w0.2: X1.38@-12.44,56.791 -2.691,56.791 0.1,54 6.401,54 X2.17@7.315,53.086 8.329,54.1 v1(17.1,54.1)
0Z_encoder2: U1_2.14 X1.45 X2.22 | length 86.3
  Top Layer w0.2: X1.45@-12.44,53.591 -8.309,53.591 -2.724,48.006 X2.22@4.775,48.006 ; v1(12.3,46.8) 12.354,46.8 12.67,47.116 U1_2.14@70.89,47.116
  Bottom Layer w0.2: X2.22@4.775,48.006 4.841,47.94 5.76,47.94 6.9,46.8 v1(12.3,46.8)
0Z_encoder3: U1_3.14 X1.50 X2.26 | length 102.2
  Top Layer w0.2: v1(12.3,39.3) 14.5,39.3 41.484,12.316 U1_3.14@70.89,12.316
  Bottom Layer w0.2: X1.50@-12.44,51.991 -4.491,51.991 0.8,46.7 6.081,46.7 X2.26@7.315,45.466 8.483,44.298 8.483,40.4 9.483,39.4 12.4,39.4 v1(12.3,39.3)
3V3_PER: F3.1 X1.13 X1.14 | length 12.1
  Top Layer w0.5: X1.13@-12.44,66.391 -8.177,66.391 -6.14,64.354 -5.495,64.354 -4.905,63.764 F3.1@-4.905,63.119
  Bottom Layer w0.5: X1.14@-12.44,66.391 -9.661,66.391 -9.656,66.395 v1(-9.632,66.395)
3V3_PER_fused: C2_1.2 C2_2.2 C2_3.2 C10.1 F3.2 R17.2 R18.2 R19.2 R20.2 R21.2 SB1.1 U1_1.10 U1_1.16 U1_2.10 U1_2.16 U1_3.10 U1_3.16 U4.8 X4.09 X4.10 | length 263.2
  Top Layer w0.3: R19.2@4.825,9.629 4.825,10.551 5.222,10.948 v1(5.266,10.948) ; R17.2@4.85,6.429 R18.2@4.85,8.029 R19.2@4.85,9.629
  Top Layer w0.5: F3.2@-0.125,63.119 -0.125,63.849 6.013,69.987 6.013,73.73 X4.10@7.518,75.235 ; X4.09@4.978,75.235 X4.10@7.518,75.235 ; U4.8@13.625,9.305 SB1.1@16.2,9.305 ; SB1.1@16.2,9.357 16.286,9.444 16.286,10.186 v1(16.65,10.55) ; C10.1@16.6,11.6 16.6,10.6 v1(16.65,10.55) ; R20.2@17.075,4.279 R21.2@17.075,6.025 17.25,6.2 17.25,6.47 17.5,6.72 17.5,9.7 v1(16.65,10.55) ; R20.2@17.2,4.3 68.6,4.3 70.89,6.59 U1_3.16@70.89,9.776 ; C2_2.2@67.634,52.934 65.5,55.068 65.5,72.065 70.19,76.755 U1_1.16@70.85,76.755 ; C2_2.2@67.7,53 67.896,52.804 68.932,52.804 69.54,52.196 U1_2.10@70.89,52.196 70.886,52.2 71.678,52.2 72.644,51.233 72.644,45.546 71.678,44.58 U1_2.16@70.978,44.58 ; U1_2.16@70.89,44.576 70.857,44.543 70.157,44.543 66.945,41.331 66.945,20.455 67.425,19.975 69.985,17.415 71.263,17.415 72.5,16.178 72.5,11.001 U1_3.16@71.278,9.78 ; U1_1.10@70.89,84.375 70.217,84.375 70.17,84.421 70.17,84.476 69.847,84.8 68,84.8 67.9,84.7 67.8,84.8 17.084,84.8 X4.10@7.518,75.235 ; U1_1.16@70.939,76.759 71.639,76.759 72.415,77.536 72.415,83.602 71.639,84.379 U1_1.10@70.939,84.379
  Bottom Layer w0.3: v1(5.266,10.948) 5.266,10.337 5.903,9.7 15.8,9.7 v1(16.65,10.55)
5V_PER: F2.1 X1.9 X1.10 | length 10.4
  Top Layer w0.5: X1.9@-12.44,67.991 -5.509,67.991 F2.1@-4.981,67.462
  Bottom Layer w0.5: X1.10@-12.44,67.991 -9.698,67.991 v1(-9.698,67.984)
5V_PER_fused: C8_1.2 C8_2.2 C8_3.2 C9.2 F2.2 U3_1.1 U3_2.1 U3_3.1 X4.05 X4.06 | length 168
  Top Layer w0.5: F2.2@-0.201,66.962 -0.201,67.692 1.918,69.811 1.971,69.811 3.5,71.34 3.5,78.836 X4.05@4.978,80.315 X4.06@7.518,80.315 10.5,83.296 10.5,93.217 12.708,95.425 C9.2@63.25,95.425 ; C9.2@63.275,95.4 U3_1.1@70.86,95.4 ; C8_3.2@70.7,31.8 70.862,31.638 70.862,28.891 U3_3.1@71.025,28.729 ; U3_2.1@70.9,63.8 70.85,63.85 70.85,67.55 C8_2.2@70.8,67.6 C8_2.2@70.9,67.7 ; U3_2.1@70.912,63.641 U3_2.1@71.025,63.529
  Bottom Layer w0.5: U3_3.1@70.625,28.729 U3_3.1@71.057,29.16 ; U3_3.1@70.68,29.211 U3_2.1@70.68,63.602 ; U3_2.1@70.833,63.755 70.833,95.555 U3_1.1@70.985,95.708 ; U3_2.1@71.025,63.529 U3_2.1@71.177,63.681
A+_1: J1_1.8 R2_1.1 R8_1.1 U2_1.14 X5_1.3 | length 56.1
  Top Layer w0.2: U2_1.14@86.765,79.299 87.665,79.299 89.535,81.169 97.741,81.169 100.475,83.902 100.525,83.902 R8_1.1@100.85,84.227 ; R8_1.1@100.85,84.277 R8_1.1@100.85,84.227 ; J1_1.8@132.988,80.787 134.6,82.4 134.6,84 133.732,84.868 132.432,84.868 131.194,86.106 X5_1.3@120.486,86.106 120.095,86.106 119.563,85.574 110.141,85.574 109.168,84.601 R2_1.1@109.158,84.601 109.108,84.601 107.907,83.4 101.677,83.4 R8_1.1@100.85,84.227
A+_2: J1_2.8 R2_2.1 R8_2.1 U2_2.14 X5_2.3 | length 56
  Top Layer w0.2: U2_2.14@86.804,47.12 87.704,47.12 89.574,48.99 96.79,48.99 99.898,52.098 R8_2.1@100.85,52.098 100.85,52.148 101.902,53.2 108.33,53.2 109.108,52.422 R2_2.1@109.158,52.422 109.208,52.422 110.181,53.395 119.603,53.395 120.135,53.927 X5_2.3@120.486,53.927 131.194,53.927 132.432,52.689 133.732,52.689 134.6,51.821 134.6,50.221 J1_2.8@132.988,48.608
A+_3: J1_3.8 R2_3.1 R8_3.1 U2_3.14 X5_3.3 | length 57.9
  Top Layer w0.2: U2_3.14@86.404,12.32 87.304,12.32 89.174,14.19 97.741,14.19 100.475,16.923 100.525,16.923 R8_3.1@100.85,17.248 ; R8_3.1@100.85,17.298 R8_3.1@100.85,17.248 ; J1_3.8@133.201,16.501 134.814,18.114 134.814,19.714 133.946,20.582 132.646,20.582 131.408,21.82 123.18,21.82 X5_3.3@120.486,19.127 120.251,19.127 119.719,18.595 110.131,18.595 109.533,17.997 109.533,17.947 109.208,17.622 109.108,17.622 107.886,16.4 101.698,16.4 R8_3.1@100.85,17.248
A-_1: C4_1.2 J1_1.7 R9_1.1 U2_1.15 X5_1.4 | length 49.7
  Top Layer w0.2: U2_1.15@86.765,78.029 89.916,78.029 90.516,78.629 97.652,78.629 100.475,81.452 100.525,81.452 100.85,81.777 R9_1.1@100.85,81.827 100.85,81.877 101.773,82.8 105.3,82.8 105.468,82.632 110.821,82.632 C4_1.2@111.102,82.352 ; C4_1.2@110.95,82.2 C4_1.2@111.102,82.352 ; C4_1.2@111.396,82.057 C4_1.2@111.102,82.352 ; J1_1.7@133.06,83.485 120.567,83.485 X5_1.4@120.486,83.566 120.447,83.566 119.431,82.55 111.3,82.55 C4_1.2@111.102,82.352
A-_2: C4_2.2 J1_2.7 R9_2.1 U2_2.15 X5_2.4 | length 49.3
  Top Layer w0.2: U2_2.15@86.804,45.85 89.956,45.85 90.556,46.45 97.652,46.45 100.475,49.272 100.525,49.272 R9_2.1@100.85,49.597 ; R9_2.1@100.85,49.647 R9_2.1@100.85,49.597 ; J1_2.7@133.058,51.387 X5_2.4@120.486,51.387 119.47,50.371 111.789,50.371 110.218,48.8 101.647,48.8 R9_2.1@100.85,49.597
A-_3: C4_3.2 J1_3.7 R9_3.1 U2_3.15 X5_3.4 | length 51.3
  Top Layer w0.2: U2_3.15@86.404,11.05 89.556,11.05 90.156,11.65 97.652,11.65 100.475,14.472 100.525,14.472 100.85,14.797 R9_3.1@100.85,14.847 100.85,14.897 101.65,15.697 111.674,15.697 C4_3.2@111.8,15.571 ; C4_3.2@111.147,15.221 111.497,15.571 C4_3.2@111.8,15.571 ; C4_3.2@111.844,15.526 C4_3.2@111.8,15.571 ; J1_3.7@133.274,19.199 123.099,19.199 X5_3.4@120.486,16.587 120.086,16.587 119.07,15.571 C4_3.2@111.8,15.571
A_encoder_1: U1_1.13 X1.41 X2.19 | length 98.6
  Top Layer w0.2: X1.41@-12.44,55.191 -6.691,55.191 -2.046,50.546 X2.19@4.775,50.546 5.821,49.5 10.8,49.5 41.865,80.565 U1_1.13@70.89,80.565
A_encoder_2: U1_2.13 X1.46 X2.23 | length 86.7
  Top Layer w0.2: X2.23@7.315,48.006 8.421,46.9 11.2,46.9 12.1,47.8 24.7,47.8 25.286,48.386 U1_2.13@70.89,48.386
  Bottom Layer w0.2: X1.46@-12.44,53.591 -3.691,53.591 0.8,49.1 5.6,49.1 5.617,49.117 6.204,49.117 X2.23@7.315,48.006
A_encoder_3: U1_3.13 X1.53 X2.28 | length 98.6
  Top Layer w0.2: X1.53@-12.44,50.391 -8.191,50.391 -4,46.2 1.501,46.2 X2.28@4.775,42.926 7.301,40.4 15.6,40.4 42.414,13.586 U1_3.13@70.89,13.586
A_single_1: U1_1.4 U2_1.13 | length 6.5
  Top Layer w0.2: U1_1.4@80.239,80.569 U2_1.13@86.765,80.569
A_single_2: U1_2.4 U2_2.13 | length 6.5
  Top Layer w0.2: U1_2.4@80.278,48.39 U2_2.13@86.804,48.39
A_single_3: U1_3.4 U2_3.13 | length 6.5
  Top Layer w0.2: U1_3.4@79.878,13.59 U2_3.13@86.404,13.59